# Altium PCB Sensor_CHC5_Temp.PcbDoc
Units mm, origin at the board's own origin, x right, y up, seen from the top; angles counter-clockwise.
Board outline 58.71 x 62.7 mm, 6 copper layers (Top Layer, Layer 2, Layer 3, Layer 4, Layer 5, Bottom Layer), stack 1.548 mm thick; 3 components, 78 nets, 106 pads, 0 vias.
Unrouted connection lines stored in the file: 63.
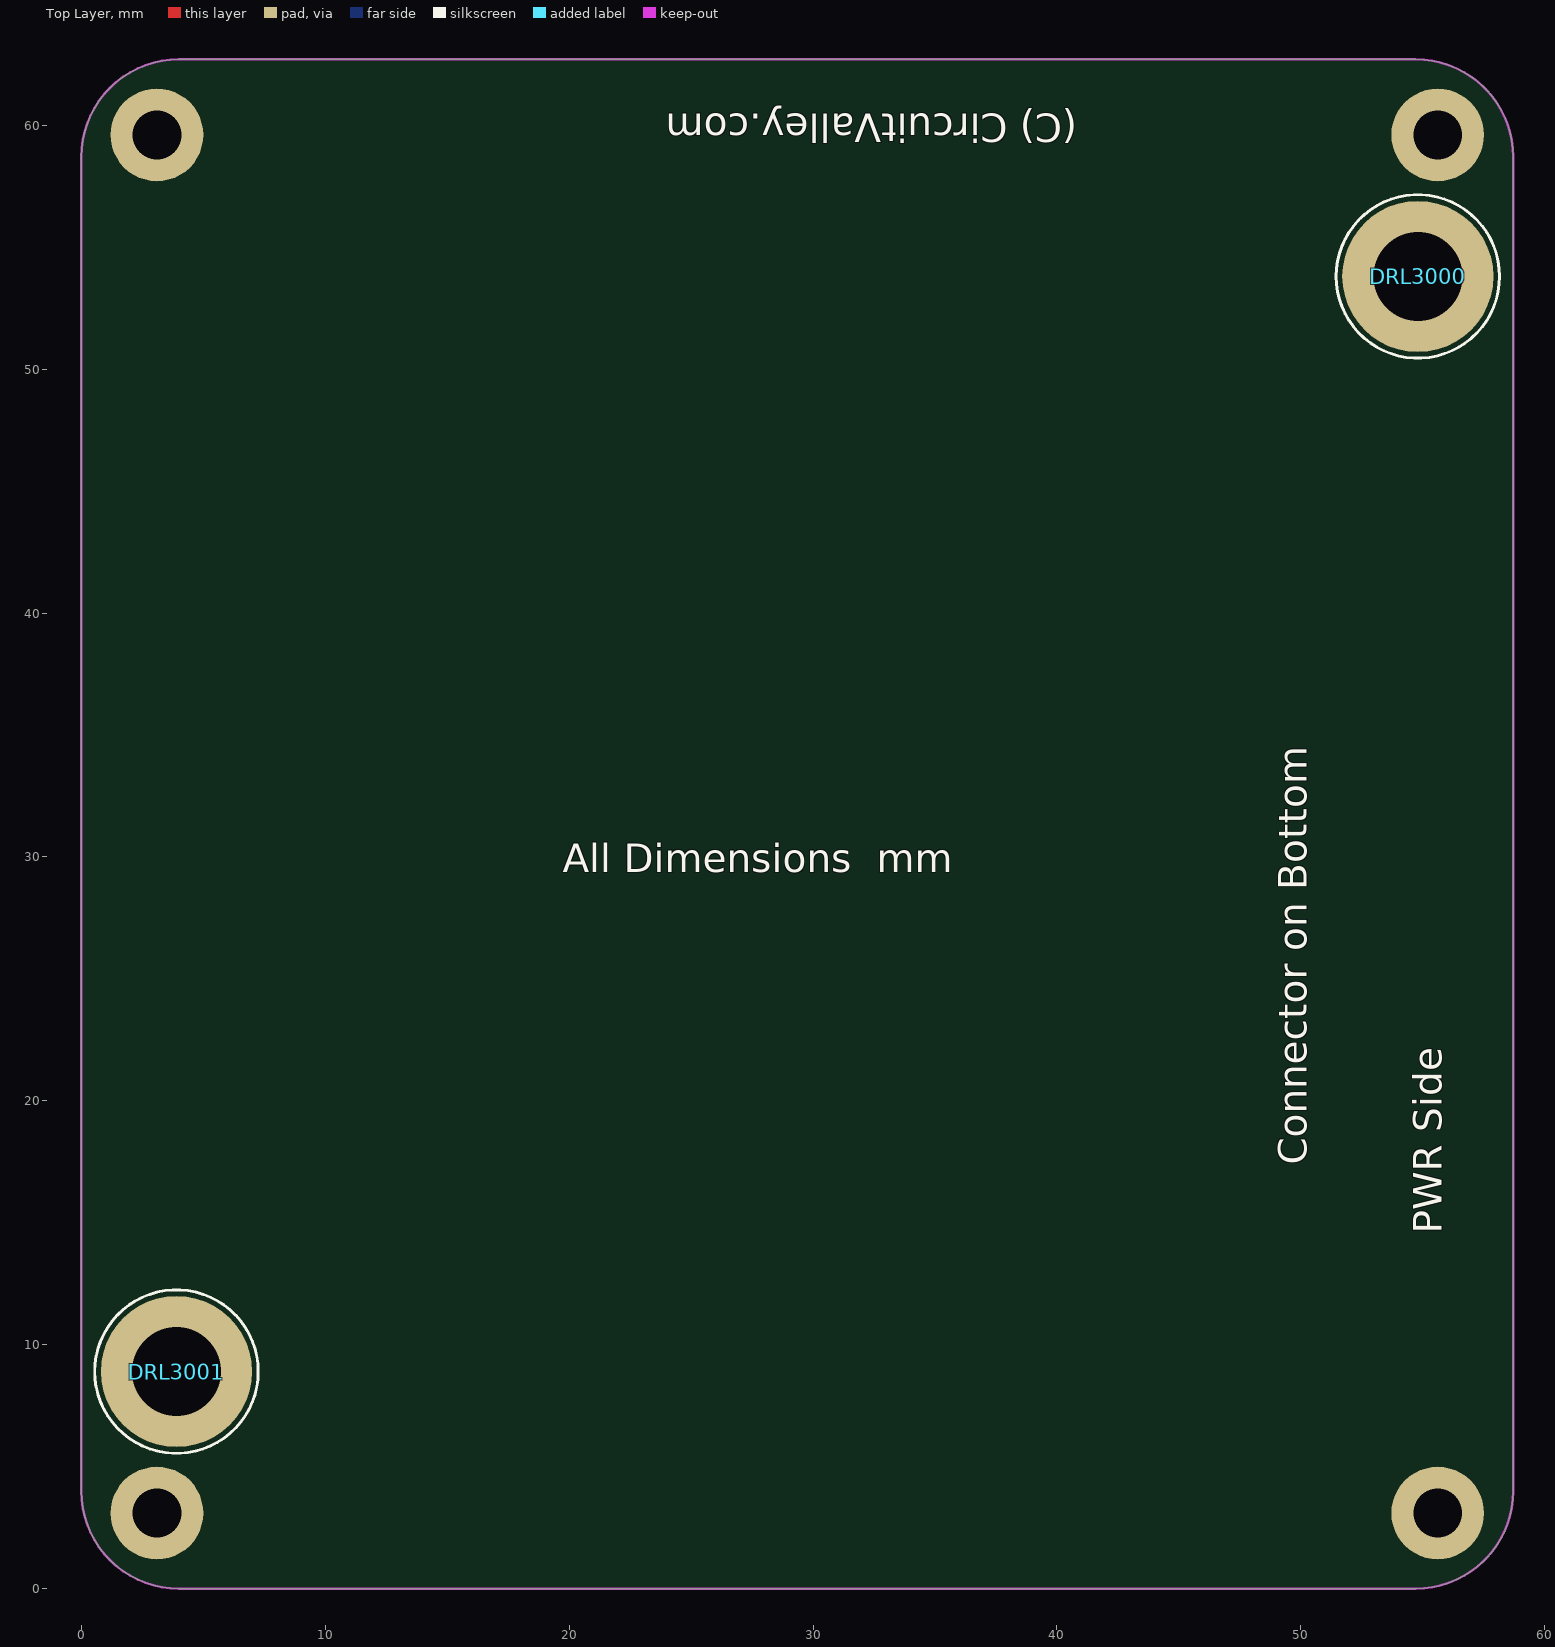
[diagram p0: Top Layer view]
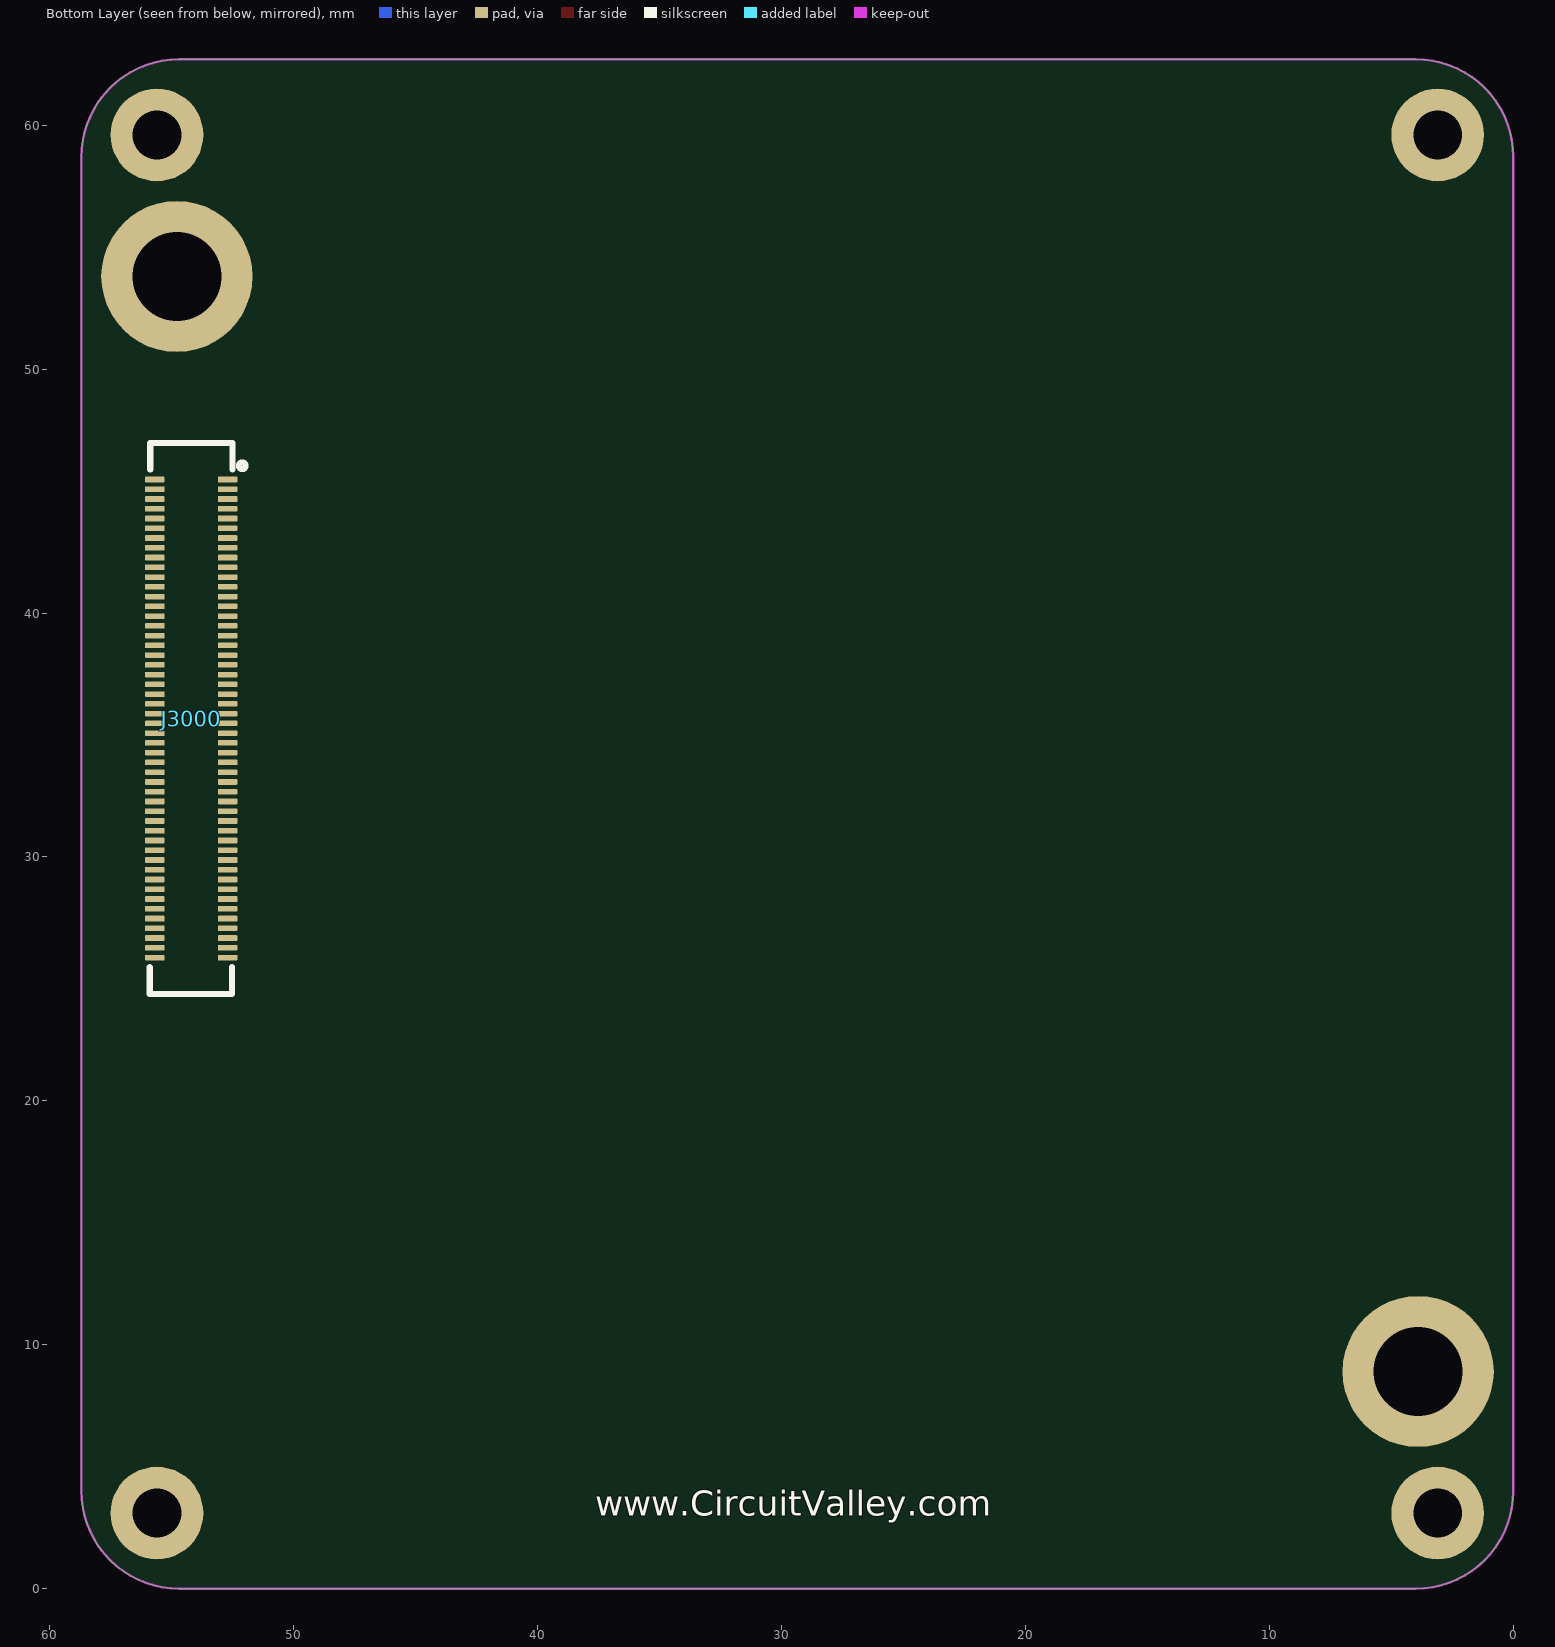
[diagram p1: Bottom Layer view, seen from below]

## Layer stack, top to bottom
Top Solder: solder mask 0.0102, Solder Resist, Dk 3.5
Top Layer: signal copper 0.035
Dielectric 2: prepreg 0.0994, PP-015, Dk 4.3
Layer 2: signal copper 0.0175
Dielectric 4: core 0.55, FR-4, Dk 4.5
Layer 3: signal copper 0.0175
Dielectric 1: prepreg 0.1088, PP-016, Dk 4.4
Layer 4: signal copper 0.0175
Dielectric 5: core 0.55, FR-4, Dk 4.5
Layer 5: signal copper 0.0175
Dielectric 3: prepreg 0.0994, PP-015, Dk 4.3
Bottom Layer: signal copper 0.035
Bottom Solder: solder mask 0.0102, Solder Resist, Dk 3.5

## Board outline
0,4.001 0,58.7 cw(c4,58.7) 4,62.7 54.707,62.7 cw(c54.707,58.7) 58.707,58.7 58.707,4 cw(c54.707,4) 54.707,0 4.001,0 cw(c4.001,4.001)

## Design rules (kind name [scope] priority, off if disabled: settings)
Clearance Clearance_GNDT [OnLayer('GND_T')] p1: gap=0.127 ignorepadtopadclearanceinfootprint=FALSE
Clearance Clearance_INT [OnLayer('Signal_INT')] p2: gap=0.127 ignorepadtopadclearanceinfootprint=FALSE
Clearance [All] p3: gap=0.09 ignorepadtopadclearanceinfootprint=FALSE
Clearance Clearance_PWR [OnLayer('PWR')] p4: gap=0.127 ignorepadtopadclearanceinfootprint=FALSE
Clearance Clearance_GNDB [OnLayer('GND_B')] p5: gap=0.127 ignorepadtopadclearanceinfootprint=FALSE
ComponentClearance ComponentClearance_1 [InComponent('M1')] p1: gap=0 collisioncheckmode=3 verticalgap=0 showdistances=FALSE
ComponentClearance [All] p2: gap=0.254 collisioncheckmode=3 verticalgap=0.254 showdistances=FALSE
DiffPairsRouting [All] p1: maxlimit=0.127 minlimit=0.102 mostfreqgap=0.127 toplayer_mingap=0.127 toplayer_minwidth=0.089 toplayer_maxwidth=0.163 toplayer_prefwidth=0.111 midlayer1_mingap=0.127 midlayer1_minwidth=0.089 midlayer1_maxwidth=0.163 midlayer1_prefwidth=0.111 midlayer2_mingap=0.127 midlayer2_minwidth=0.089 midlayer2_maxwidth=0.163 midlayer2_prefwidth=0.111 midlayer3_mingap=0.127 midlayer3_minwidth=0.089 midlayer3_maxwidth=0.163 midlayer3_prefwidth=0.111 midlayer4_mingap=0.127 midlayer4_minwidth=0.089 midlayer4_maxwidth=0.163 midlayer4_prefwidth=0.111 bottomlayer_minwidth=0.089 bottomlayer_maxwidth=0.163 bottomlayer_prefwidth=0.111 maxuncoupledlength=12.7
HoleSize [All] p1: absolutevalues=TRUE maxlimit=5 minlimit=0.025 maxpercent=80.000 minpercent=20.000
MatchedLengths MatchLengths_xSignals_U2000_J2000 [InxSignalClass('xSignals_U2000_J2000_MatchLengthsClass')] p1: tolerance=0.127 checknetsindiffpair=FALSE checkdiffpairvsdiffpair=TRUE checkxsignals=TRUE checkothers=TRUE usedelayunits=TRUE delaytolerance=5.000000
MinimumSolderMaskSliver [All] p1: minsoldermaskwidth=0.001
PlaneClearance [All] p1: clearance=0.152
PlaneConnect PlaneConnect_1 [All] p1: pad.planeconnectstyle=Relief pad.reliefexpansion=0.508 pad.reliefentries=4 pad.reliefconductorwidth=0.254 pad.reliefairgap=0.127 via.planeconnectstyle=Direct via.reliefexpansion=0.508 via.reliefentries=4 via.reliefconductorwidth=0.254 via.reliefairgap=0.254
PolygonConnect [All] p1: thpad.connectstyle=Relief thpad.reliefconductorwidth=0.254 thpad.reliefentries=4 thpad.polygonreliefangle="90 Angle" thpad.airgapwidth=0.127 smdpad.connectstyle=Relief smdpad.reliefconductorwidth=0.254 smdpad.reliefentries=4 smdpad.polygonreliefangle="90 Angle" smdpad.airgapwidth=0.127 via.connectstyle=Direct via.reliefconductorwidth=0.254 via.reliefentries=4 via.polygonreliefangle="90 Angle" via.airgapwidth=0.254
RoutingVias [All] p1: holewidth=0.3 width=0.45 viastyle="Through Hole" minholewidth=0.2 minwidth=0.45 maxholewidth=6.3 maxwidth=7
SilkToSilkClearance [All] p1: silktosilkclearance=0
SilkToSolderMaskClearance [IsPad] p1: minsilkscreentomaskgap=0 clearancetoexposedcopper=TRUE
SolderMaskExpansion [All] p1: expansion=0 istentingtop=FALSE
SupplyNets "Schematic Supply Nets_5" [InNet('1V1')] p1: voltage=0.000
SupplyNets "Schematic Supply Nets_4" [InNet('2V9')] p2: voltage=0.000
SupplyNets "Schematic Supply Nets_3" [InNet('GND')] p3: voltage=0.000
SupplyNets "Schematic Supply Nets_2" [InNet('3V3')] p4: voltage=0.000
SupplyNets "Schematic Supply Nets_1" [InNet('1V8')] p5: voltage=0.000
SupplyNets "Schematic Supply Nets" [InNet('VIN')] p6: voltage=0.000
Width [All] p1: maxlimit=2.54 minlimit=0.09 preferedwidth=0.127 midlayer1_minwidth=0.127 midlayer2_minwidth=0.127 midlayer3_minwidth=0.127 midlayer4_minwidth=0.127 minimp=50.000000 maximp=50.000000 favimp=50.000000
22 further rules are at their usual default settings.

## Classes and differential pairs
differential pair P42: +P42_P -P42_N
differential pair P36: +P36_P -P36_N
differential pair P35: +P35_P -P35_N
differential pair P30: +P30_P -P30_N
differential pair P24: +P24_P -P24_N

## Components (designator, comment, footprint, x,y, rotation, side; value= is the part's Value field where it differs from the comment)
DRL3000 "Wurth Standoff" M2_STANDOFF_SMTSOM205BTR 54.793,53.8 r90 top
DRL3001 "Wurth Standoff" M2_STANDOFF_SMTSOM205BTR 3.9,8.9 r90 top
J3000 "DF40HC(3.0)-100DS-0.4V(51)" DF40HC(3.0)-100DS-0.4V(51) 54.203,35.674 r270 bottom

## Footprints (in the part's own frame and the unit in brackets; to place one, negate y for a bottom-side part, rotate by r counter-clockwise, add the part's x,y. Pads: shape width x height; smd on the part's side, far side on the other; paste and mask are expansions set on the pad)
DF40HC(3.0)-100DS-0.4V(51) [mm] "Hiros 100Pin 0.4mm Connector Used with Camera Sensors"
  rrect25% 0.23x0.8 smd: 1(-9.8,1.49) 2(-9.8,-1.49) 3(-9.4,1.49) 4(-9.4,-1.49) 5(-9,1.49) 6(-9,-1.49) 7(-8.6,1.49) 8(-8.6,-1.49) 9(-8.2,1.49) 10(-8.2,-1.49) 11(-7.8,1.49) 12(-7.8,-1.49) 13(-7.4,1.49) 14(-7.4,-1.49) 15(-7,1.49) 16(-7,-1.49) 17(-6.6,1.49) 18(-6.6,-1.49) 19(-6.2,1.49) 20(-6.2,-1.49) 21(-5.8,1.49) 22(-5.8,-1.49) 23(-5.4,1.49) 24(-5.4,-1.49) 25(-5,1.49) 26(-5,-1.49) 27(-4.6,1.49) 28(-4.6,-1.49) 29(-4.2,1.49) 30(-4.2,-1.49) 31(-3.8,1.49) 32(-3.8,-1.49) 33(-3.4,1.49) 34(-3.4,-1.49) 35(-3,1.49) 36(-3,-1.49) 37(-2.6,1.49) 38(-2.6,-1.49) 39(-2.2,1.49) 40(-2.2,-1.49) 41(-1.8,1.49) 42(-1.8,-1.49) 43(-1.4,1.49) 44(-1.4,-1.49) 45(-1,1.49) 46(-1,-1.49) 47(-0.6,1.49) 48(-0.6,-1.49) 49(-0.2,1.49) 50(-0.2,-1.49) 51(0.2,1.49) 52(0.2,-1.49) 53(0.6,1.49) 54(0.6,-1.49) 55(1,1.49) 56(1,-1.49) 57(1.4,1.49) 58(1.4,-1.49) 59(1.8,1.49) 60(1.8,-1.49) 61(2.2,1.49) 62(2.2,-1.49) 63(2.6,1.49) 64(2.6,-1.49) 65(3,1.49) 66(3,-1.49) 67(3.4,1.49) 68(3.4,-1.49) 69(3.8,1.49) 70(3.8,-1.49) 71(4.2,1.49) 72(4.2,-1.49) 73(4.6,1.49) 74(4.6,-1.49) 75(5,1.49) 76(5,-1.49) 77(5.4,1.49) 78(5.4,-1.49) 79(5.8,1.49) 80(5.8,-1.49) 81(6.2,1.49) 82(6.2,-1.49) 83(6.6,1.49) 84(6.6,-1.49) 85(7,1.49) 86(7,-1.49) 87(7.4,1.49) 88(7.4,-1.49) 89(7.8,1.49) 90(7.8,-1.49) 91(8.2,1.49) 92(8.2,-1.49) 93(8.6,1.49) 94(8.6,-1.49) 95(9,1.49) 96(9,-1.49) 97(9.4,1.49) 98(9.4,-1.49) 99(9.8,1.49) 100(9.8,-1.49)
  silkscreen extent -11.3,-1.69 11.29,2.23, body extent -11.29,-1.69 11.3,1.69, height 2.91
M2_STANDOFF_SMTSOM205BTR [mm] "SMTSOM205BTR"
  round 6.2 hole 3.65 paste-2539.97: 0(0,0)
  silkscreen extent -3.35,-3.35 3.35,3.35, body extent -2.78,-2.77 2.78,2.78, height 0.51

## Part data
DRL3000 DRL3001: library part PCB_Sandoff
J3000: "Hiro 100 pin Connector Receptical"

## Free pads (board coordinates)
  round 3.8 hole 2: A5(3.1,59.6) A5(3.1,3.1) A5(55.607,3.1) A5(55.607,59.6)

## Nets (pads, with @x,y where several pads share a name; then routed paths per layer and width w, separated by ;. In a path a pad name is that pad's centre, name@x,y a point inside that pad or via, vN(x,y) a via of type N, cw(c..) or ccw(c..) an arc to the next point about the centre after c; other vN are vias at no path point)
1V1: 
1V8: 
2V9: 
3V3: 
CAM_CLK: 
ENABLE: 
GND: DRL3000.0 DRL3001.0 J3000.1 J3000.2 J3000.7 J3000.8 J3000.13 J3000.14 J3000.19 J3000.20 J3000.25 J3000.26 J3000.31 J3000.32 J3000.37 J3000.38 J3000.43 J3000.44 J3000.49 J3000.50 J3000.55 J3000.56 J3000.61 J3000.62 J3000.67 J3000.68 J3000.73 J3000.74 J3000.79 J3000.80 J3000.85 J3000.86 pad.A5
I2C0_SCL: J3000.84
I2C0_SDA: J3000.82
IO4_0: J3000.18
IO4_1_N: J3000.9
IO4_1_P: J3000.11
IO4_23_N: J3000.21
IO4_23_P: J3000.23
IO4_24_N: J3000.17
IO4_24_P: J3000.15
IO4_25: J3000.16
IO5_0: J3000.59
IO5_1_N: J3000.77
IO5_1_P: J3000.75
IO5_2_N: J3000.78
IO5_2_P: J3000.76
IO5_4_N: J3000.69
IO5_4_P: J3000.71
IO5_5_N: J3000.60
IO5_5_P: J3000.58
IO5_25: J3000.46
MIO0: J3000.47
MIO15: J3000.45
MIPI0_CLK_N: 
MIPI0_CLK_P: 
MIPI0_D1_N: 
MIPI0_D1_P: 
MIPI0_D2_N: 
MIPI0_D2_P: 
MIPI0_D3_N: 
MIPI0_D3_P: 
MIPI0_D4_N: 
MIPI0_D4_P: 
MIPI1_CLK_N: J3000.70
MIPI1_CLK_P: J3000.72
MIPI1_D0_N: J3000.64
MIPI1_D0_P: J3000.66
MIPI1_D1_N: J3000.54
MIPI1_D1_P: J3000.52
MIPI1_D2_N: J3000.53
MIPI1_D2_P: J3000.51
MIPI1_D3_N: J3000.65
MIPI1_D3_P: J3000.63
NetC3010_2: 
NetC3021_2: 
NetC3087_2: 
NetL3005_1: 
NetQ3000_5: 
NetR3000_2: 
NetR3009_2: 
NetR3024_1: 
NetR3026_1: 
P24_N: J3000.22
P24_P: J3000.24
P30_N: J3000.28
P30_P: J3000.30
P35_N: J3000.35
P35_P: J3000.33
P36_N: J3000.36
P36_P: J3000.34
P42_N: J3000.40
P42_P: J3000.42
SCL_1V8: 
SDA_1V8: 
TOUT0: 
VIN: J3000.87 J3000.88 J3000.89 J3000.90 J3000.91 J3000.92 J3000.93 J3000.94 J3000.95 J3000.96 J3000.97 J3000.98 J3000.99 J3000.100
XCLR: 
XHS: 
XMASTER: 
XTRIG1: 
XTRIG2: 
XVS: 
pads on no net: J3000.3 J3000.4 J3000.5 J3000.6 J3000.10 J3000.12 J3000.27 J3000.29 J3000.39 J3000.41 J3000.48 J3000.57 J3000.81 J3000.83

## Keep-outs
Keep-Out Layer:
  lines w0.1: 0,3.993 ccw(c3.993,3.993) 3.993,0 54.7,0 ccw(c54.7,4) 58.7,4 58.7,58.7 ccw(c54.7,58.7) 54.7,62.7 3.993,62.7 ccw(c3.993,58.707) 0,58.707 0,58.7 0,4 0,3.993

## Silkscreen, mask and mechanical layers (free items; w line width, h text height)
Top Overlay:
  text "(C) CircuitValley.com" at 40.838,60.864 h2 r180
  text "All Dimensions  mm" at 19.736,28.977 h2
  text "Connector on Bottom" at 50.627,17.374 h2 r90
  text "PWR Side" at 56.164,14.554 h2 r90
Bottom Overlay:
  text "www.CircuitValley.com" at 37.643,2.647 h1.78
Top Solder:
  region: 3410 vertices and 1 holes, not listed, extent 51.807,52.363 53.804,53.673

## Dimensions
54.7,58.7 to 62.078,62.078 on Top Overlay
3.9,8.9 to 3.993,0 on Top Overlay
3.1,3.1 to 3.993,0 on Top Overlay
3.9,8.9 to 0,4 on Top Overlay
0,3.993 to 3.1,3.1 on Top Overlay
0,58.7 to 58.7,58.7 on Top Overlay
54.7,0 to 54.7,62.7 on Top Overlay
58.7,58.7 to 54.203,48.412 on Top Overlay
54.7,0 to 39.675,35.674 on Top Overlay